# Altium PCB USBPanel.PcbDoc
Units mil, origin at the board's own origin, x right, y up, seen from the top; angles counter-clockwise.
Board outline 2362.2 x 893.7 mil, 2 copper layers (Top Layer, Bottom Layer); 1 components, 0 nets, 0 pads, 0 vias.
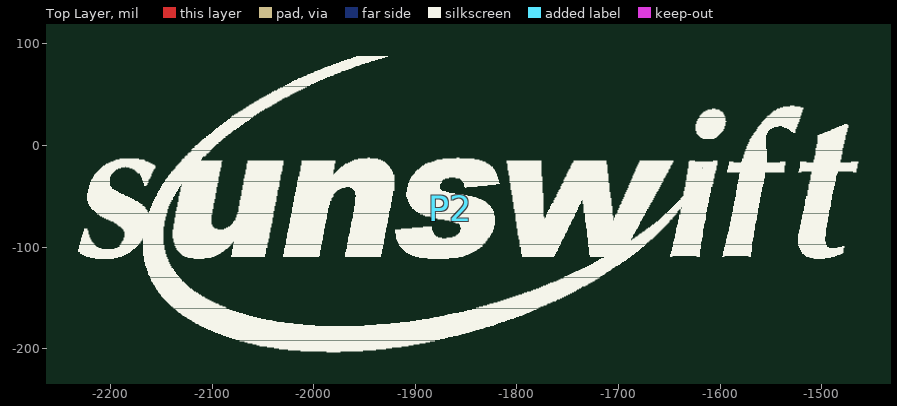
[diagram p0: Top Layer view]
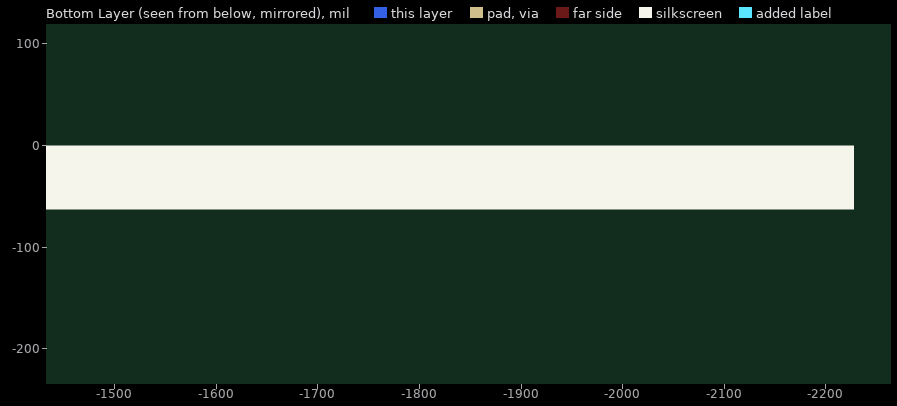
[diagram p1: Bottom Layer view, seen from below]

## Layer stack, top to bottom
Top Layer: signal copper 1.4
Dielectric: dielectric 12.6, FR-4, Dk 4.8
Bottom Layer: signal copper 1.4

## Board outline
-2294.87,-254.11 -2294.87,639.59 67.13,639.59 67.33,-254.11

## Design rules (kind name [scope] priority, off if disabled: settings)
Clearance [All] p1: gap=10
PolygonConnect [All] p1: connectstyle=Relief reliefconductorwidth=10 reliefentries=4 polygonreliefangle="90 Angle"
RoutingVias [All] p1: holewidth=28 width=50 viastyle="Through Hole" minholewidth=28 minwidth=50 maxholewidth=28 maxwidth=50
SilkscreenOverComponentPads [All] p1: minsilkscreentomaskgap=10
SolderMaskExpansion [All] p1: expansion=4
Width [All] p1: maxlimit=10 minlimit=10 preferedwidth=10
27 further rules are at their usual default settings.

## Components (designator, comment, footprint, x,y, rotation, side; value= is the part's Value field where it differs from the comment)
P2 "SUN_LOGO" SUNSWIFTLOGO -1865,-62 r0 top (schematic designator P1)

## Footprints (in the part's own frame and the unit in brackets; to place one, negate y for a bottom-side part, rotate by r counter-clockwise, add the part's x,y. Pads: shape width x height; smd on the part's side, far side on the other; paste and mask are expansions set on the pad)
SUNSWIFTLOGO [mil] "Sunswift Logo"
  silkscreen extent -367,-141 401,150

## Nets (pads, with @x,y where several pads share a name; then routed paths per layer and width w, separated by ;. In a path a pad name is that pad's centre, name@x,y a point inside that pad or via, vN(x,y) a via of type N, cw(c..) or ccw(c..) an arc to the next point about the centre after c; other vN are vias at no path point)

## Silkscreen, mask and mechanical layers (free items; w line width, h text height)
Top Overlay:
  text "USB" at -359,213 h60
  text "SunRef 2011" at -1270,-206 h118.11
Bottom Overlay:
  rectangle: -2227.94,-63.17 0.4,-0.17
  text "THIS SIDE IN" at 15,525 h60
  text "CAN" at -1162,517 h60
  text "USB" at -202,203 h60
  text "SUITS HAMMOND MFG 1593L" at -40.94,-176.35 h60
Mechanical 1:
  circle w10: c-1629.65,313.93 r259.84
  circle w10: c-854.06,313.93 r259.84
  lines w10: 67.13,639.59 67.33,-254.11 -2294.87,-254.11 -2294.87,639.59 -995.27,639.59 67.33,639.59 ; -457.86,-18.86 -457.86,177.99 -64,177.99 -64,-18.86 -457.86,-18.86